# Altium PCB LazeMEGA.PcbDoc
Units mm, origin at the board's own origin, x right, y up, seen from the top; angles counter-clockwise.
Board outline 50 x 50 mm, 2 copper layers (Top Layer, Bottom Layer); 70 components, 75 nets, 320 pads, 150 vias.
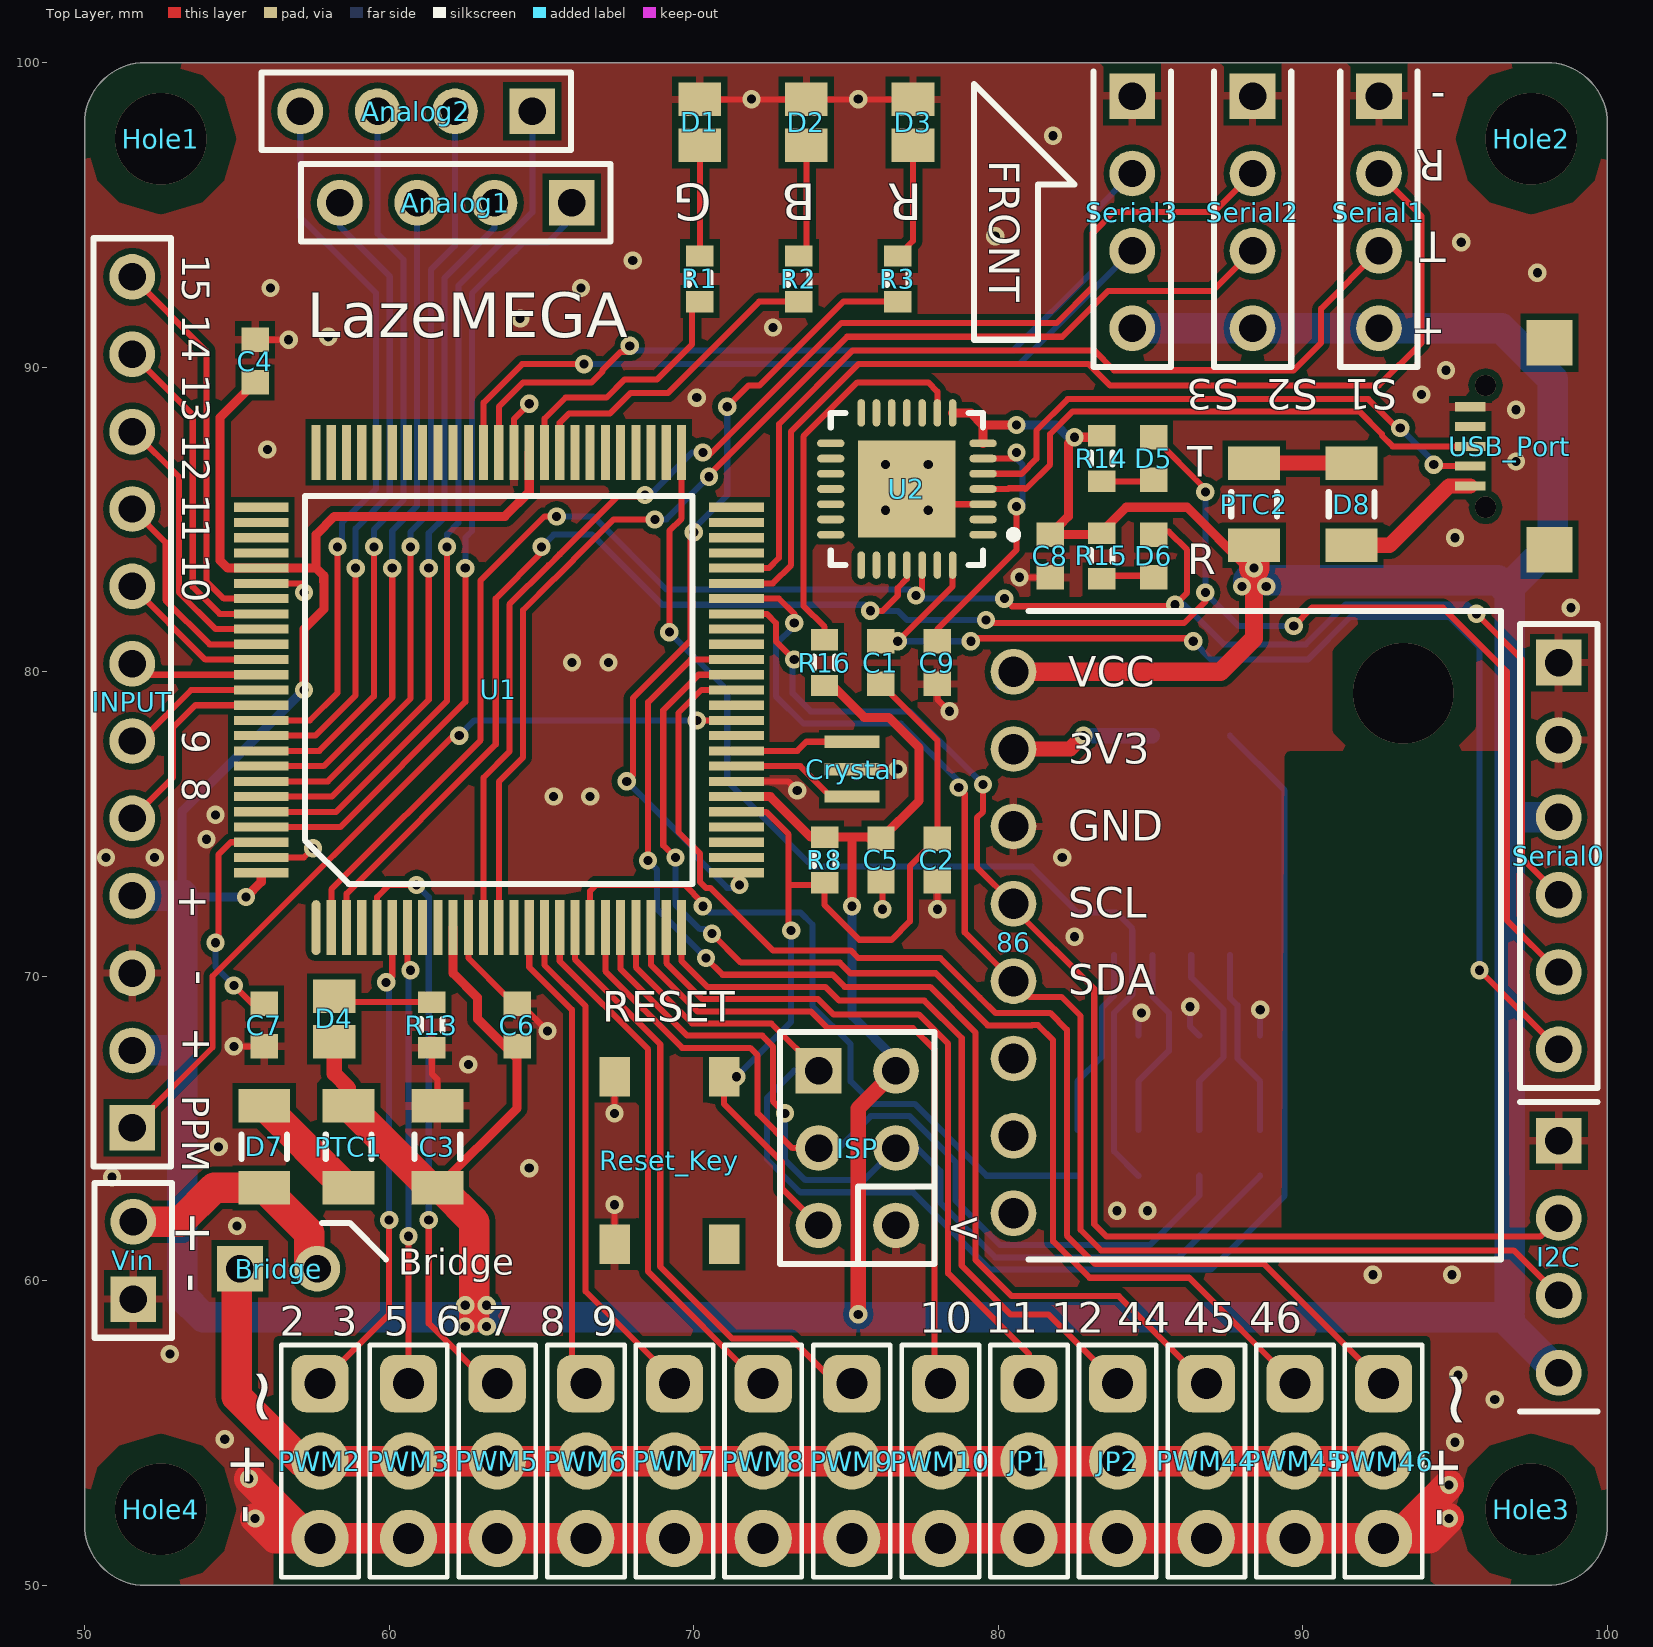
[diagram p0: Top Layer view]
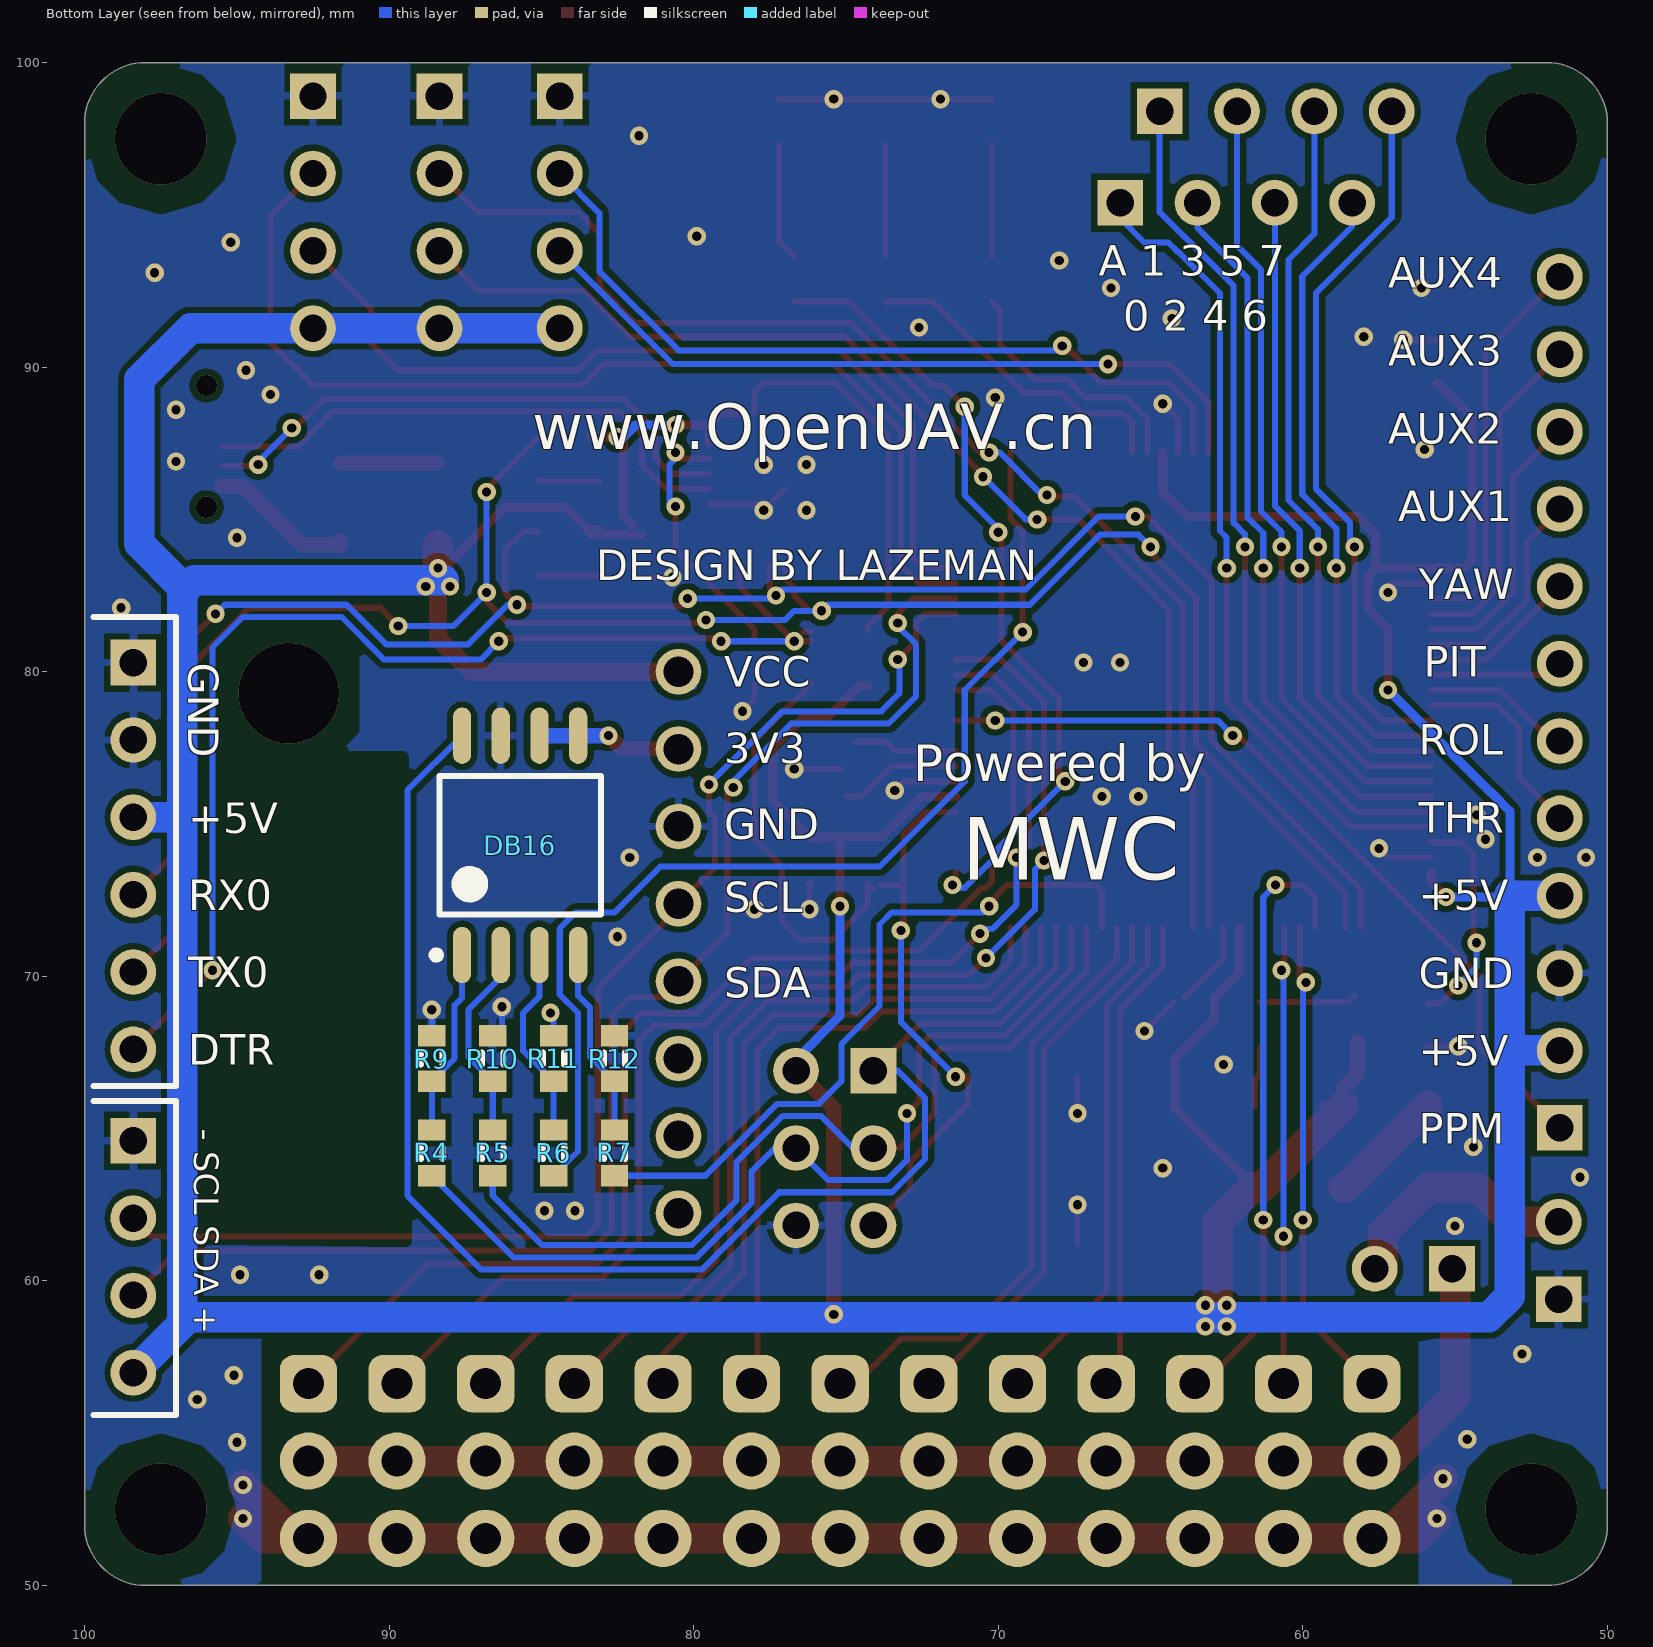
[diagram p1: Bottom Layer view, seen from below]

## Layer stack, top to bottom
Top Layer: signal copper 0.0356
Dielectric: dielectric 0.32, FR-4, Dk 4.8
Bottom Layer: signal copper 0.0356

## Board outline
50,52 50,98 cw(c52,98) 52,100 98,100 cw(c98,98) 100,98 100,52 cw(c98,52) 98,50 52,50 cw(c52,52)

## Design rules (kind name [scope] priority, off if disabled: settings)
Clearance [All] p1: gap=0.2
ComponentClearance [All] p1: gap=0.254 collisioncheckmode=3 verticalgap=0 showdistances=FALSE
HoleSize [All] p1: absolutevalues=TRUE maxlimit=3.5 minlimit=0.15 maxpercent=80.000 minpercent=20.000
HoleToHoleClearance [All] p1: gap=0 allowstackedmicrovias=TRUE
MinimumSolderMaskSliver [All] p1: minsoldermaskwidth=0
PolygonConnect PolygonConnect_2 [IsPad] p1: connectstyle=Relief reliefconductorwidth=0.254 reliefentries=4 polygonreliefangle="90 Angle"
PolygonConnect [IsVia] p2: connectstyle=Direct reliefconductorwidth=0.254 reliefentries=4 polygonreliefangle="90 Angle"
RoomDefinition LazeMEGA [InComponentClass('LazeMEGA')] p1: confinementstyle=ConfineOut formatcopy=TRUE lockcomponents=FALSE outline 0,0 50.8,0 50.8,25.4 0,25.4
RoomDefinition DB16 [InComponentClass('DB16')] p2: confinementstyle=ConfineOut formatcopy=TRUE lockcomponents=FALSE outline 101.2,49 145.3,49 145.3,61.5 101.2,61.5
RoomDefinition CP2102 [InComponentClass('CP2102')] p3: confinementstyle=ConfineOut formatcopy=TRUE lockcomponents=FALSE outline 102,74.5 193.5,74.5 193.5,86.1 102,86.1
RoutingVias [All] p1: holewidth=0.3 width=0.6 viastyle="Through Hole" minholewidth=0.3 minwidth=0.5 maxholewidth=3 maxwidth=3
SilkToSilkClearance [All] p1: silktosilkclearance=0
SilkscreenOverComponentPads [All] p1: minsilkscreentomaskgap=0
SolderMaskExpansion [All] p1: expansion=0.102
Width [All] p1: maxlimit=1 minlimit=0.2 preferedwidth=0.3
22 further rules are at their usual default settings.

## Classes and differential pairs
component class LazeMEGA: 86 Analog1 Analog2 Bridge C1 C2 C3 C4 C5 C6 C7 Crystal D1 D2 D3 D4 D7 Hole1 Hole2 Hole3 Hole4 I2C INPUT ISP JP1 JP2 PTC1 PWM2 PWM3 PWM5 PWM6 PWM7 PWM8 PWM9 PWM10 PWM44 PWM45 PWM46 R1 R2 R3 R8 R13 Reset_Key Serial0 Serial1 Serial2 Serial3 U1 Vin
component class CP2102: C8 C9 D5 D6 D8 PTC2 R14 R15 R16 U2 USB_Port
component class DB16: DB16 R4 R5 R6 R7 R9 R10 R11 R12

## Components (designator, comment, footprint, x,y, rotation, side; value= is the part's Value field where it differs from the comment)
86 "" GY-87 80.5,80 r0 top locked
Analog1 "Header 4" HDR1X4 66,95.4 r180 top
Analog2 "Header 4" HDR1X4 64.7,98.4 r180 top
Bridge "Header 2" HDR1X2 55.1,60.4 r0 top
C1 "104" CAPC1608L 76.147,80.3 r90 top
C2 "22p" CAPC1608L 78,73.818 r270 top
C3 "20uF" CAPC3216L 61.583,64.4 r270 top
C4 "104" CAPC1608L 55.6,90.2 r270 top
C5 "104" CAPC1608L 76.15,73.818 r90 top
C6 "104" CAPC1608L 64.2,68.4 r270 top
C7 "104" CAPC1608L 55.9,68.4 r90 top
C8 "104" CAPC1608L 81.7,83.8 r270 top
C9 "104" CAPC1608L 78,80.3 r90 top
Crystal "Crystal 16M" Crystal3Foot 75.2,76.8 r0 top
D1 "LED Green" CAPC2012L 70.2,98.039 r90 top
D2 "LED Blue" CAPC2012L 73.7,98.039 r90 top
D3 "LED Red" CAPC2012L 77.2,98.039 r90 top
D4 "LED Red" CAPC2012L 58.2,68.6 r90 top
D5 "LED CP" CAPC1608L 85.1,87 r90 top
D6 "LED CP" CAPC1608L 85.1,83.8 r90 top
D7 "Schottky" CAPC3216L 55.9,64.4 r90 top
D8 "Schottky" CAPC3216L 91.6,85.5 r90 top
DB16 "AT45DB16" AT45DB16 85.7,74.3 r90 bottom
Hole1 "3mmHole" 3mmHoleSmall 52.5,97.5 r0 top
Hole2 "3mmHole" 3mmHoleSmall 97.5,97.5 r90 top
Hole3 "3mmHole" 3mmHoleSmall 97.5,52.5 r90 top
Hole4 "3mmHole" 3mmHoleSmall 52.5,52.5 r90 top
I2C "Header 4" HDR1X4 98.4,64.6 r270 top
INPUT "Header 12" HDR1X12 51.562,65.024 r90 top
ISP "Header 3X2" HDR2X3 74.1,66.9 r270 top
JP1 "Servo out 1" JP 80.941,54.102 r270 top
JP2 "Servo out 1" JP 83.852,54.102 r270 top
PTC1 "Fuse" CAPC3216L 58.667,64.4 r90 top
PTC2 "Fuse" CAPC3216L 88.4,85.5 r270 top
PWM2 "Servo out 1" JP 57.658,54.102 r270 top
PWM3 "Servo out 1" JP 60.568,54.102 r270 top
PWM5 "Servo out 1" JP 63.479,54.102 r270 top
PWM6 "Servo out 1" JP 66.389,54.102 r270 top
PWM7 "Servo out 1" JP 69.3,54.102 r270 top
PWM8 "Servo out 1" JP 72.21,54.102 r270 top
PWM9 "Servo out 1" JP 75.12,54.102 r270 top
PWM10 "Servo out 1" JP 78.031,54.102 r270 top
PWM44 "Servo out 1" JP 86.762,54.102 r270 top
PWM45 "Servo out 1" JP 89.673,54.102 r270 top
PWM46 "Servo out 1" JP 92.583,54.102 r270 top
R1 "1k" RESC1608L 70.2,92.9 r90 top
R2 "1k" RESC1608L 73.45,92.9 r90 top
R3 "1k" RESC1608L 76.7,92.9 r90 top
R4 "4.7k" RESC1608L 88.6,64.2 r270 bottom
R5 "4.7k" RESC1608L 86.6,64.2 r270 bottom
R6 "4.7k" RESC1608L 84.6,64.2 r270 bottom
R7 "4.7k" RESC1608L 82.6,64.2 r270 bottom
R8 "10k" RESC1608L 74.3,73.818 r90 top
R9 "10k" RESC1608L 88.6,67.3 r270 bottom
R10 "10k" RESC1608L 86.6,67.3 r270 bottom
R11 "10k" RESC1608L 84.6,67.3 r270 bottom
R12 "10k" RESC1608L 82.6,67.3 r270 bottom
R13 "1k" RESC1608L 61.4,68.4 r270 top
R14 "1K" RESC1608L 83.4,87 r270 top
R15 "1K" RESC1608L 83.4,83.8 r270 top
R16 "10k" RESC1608L 74.295,80.3 r270 top
Reset_Key "Key" Key 67.4,66.7 r0 top locked
Serial0 "Header 6" HDR1X6 98.4,80.3 r270 top
Serial1 "Header 4" HDR1X4 92.5,98.9 r270 top
Serial2 "Header 4" HDR1X4 88.35,98.9 r270 top
Serial3 "Header 4" HDR1X4 84.4,98.9 r270 top
U1 "Atmega2560" ATMEGA2560 57.6,71.6 r90 top locked
U2 "CP2102" CP2102 77,86 r180 top
USB_Port "Micro USB" "Micro USB" 95.5,86.1 r90 top
Vin "Header 2" HDR1X2 51.6,59.4 r90 top

## Footprints (in the part's own frame and the unit in brackets; to place one, negate y for a bottom-side part, rotate by r counter-clockwise, add the part's x,y. Pads: shape width x height; smd on the part's side, far side on the other; paste and mask are expansions set on the pad)
3mmHoleSmall [mm]
  Top Layer pour cut-out: -1.27,1.905 0,2.286 1.27,1.905 1.905,1.27 2.286,0 1.905,-1.27 1.27,-1.905 0,-2.286 -1.27,-1.905 -1.905,-1.27 -2.286,0 -1.905,1.27
  Bottom Layer pour cut-out: -1.27,1.905 0,2.286 1.27,1.905 1.905,1.27 2.286,0 1.905,-1.27 1.27,-1.905 0,-2.286 -1.27,-1.905 -1.905,-1.27 -2.286,0 -1.905,1.27
AT45DB16 [mm] "SOP, 8-Leads, Body 5.3x5.4mm (max), Pitch 1.27mm, IPC Medium Density"
  oval 1.85x0.6 smd: 1(-3.6,1.905) 2(-3.6,0.635) 3(-3.6,-0.635) 4(-3.6,-1.905) 5(3.6,-1.905) 6(3.6,-0.635) 7(3.6,0.635) 8(3.6,1.905)
  silkscreen extent -3.72,-2.65 2.27,2.88, body extent -2.68,-2.7 2.68,2.7, height 2.16
ATMEGA2560 [mm]
  oval 1.8x0.3 smd: 1(0,0)
  rect 1.8x0.3 smd: 2(0,-0.5) 3(0,-1) 4(0,-1.5) 5(0,-2) 6(0,-2.5) 7(0,-3) 8(0,-3.5) 9(0,-4) 10(0,-4.5) 11(0,-5) 12(0,-5.5) 13(0,-6) 14(0,-6.5) 15(0,-7) 16(0,-7.5) 17(0,-8) 18(0,-8.5) 19(0,-9) 20(0,-9.5) 21(0,-10) 22(0,-10.5) 23(0,-11) 24(0,-11.5) 25(0,-12) 51(15.6,-12) 52(15.6,-11.5) 53(15.6,-11) 54(15.6,-10.5) 55(15.6,-10) 56(15.6,-9.5) 57(15.6,-9) 58(15.6,-8.5) 59(15.6,-8) 60(15.6,-7.5) 61(15.6,-7) 62(15.6,-6.5) 63(15.6,-6) 64(15.6,-5.5) 65(15.6,-5) 66(15.6,-4.5) 67(15.6,-4) 68(15.6,-3.5) 69(15.6,-3) 70(15.6,-2.5) 71(15.6,-2) 72(15.6,-1.5) 73(15.6,-1) 74(15.6,-0.5) 75(15.6,0)
  rect 0.3x1.8 smd: 26(1.8,-13.8) 27(2.3,-13.8) 28(2.8,-13.8) 29(3.3,-13.8) 30(3.8,-13.8) 31(4.3,-13.8) 32(4.8,-13.8) 33(5.3,-13.8) 34(5.8,-13.8) 35(6.3,-13.8) 36(6.8,-13.8) 37(7.3,-13.8) 38(7.8,-13.8) 39(8.3,-13.8) 40(8.8,-13.8) 41(9.3,-13.8) 42(9.8,-13.8) 43(10.3,-13.8) 44(10.8,-13.8) 45(11.3,-13.8) 46(11.8,-13.8) 47(12.3,-13.8) 48(12.8,-13.8) 49(13.3,-13.8) 50(13.8,-13.8) 76(13.8,1.8) 77(13.3,1.8) 78(12.8,1.8) 79(12.3,1.8) 80(11.8,1.8) 81(11.3,1.8) 82(10.8,1.8) 83(10.3,1.8) 84(9.8,1.8) 85(9.3,1.8) 86(8.8,1.8) 87(8.3,1.8) 88(7.8,1.8) 89(7.3,1.8) 90(6.8,1.8) 91(6.3,1.8) 92(5.8,1.8) 93(5.3,1.8) 94(4.8,1.8) 95(4.3,1.8) 96(3.8,1.8) 97(3.3,1.8) 98(2.8,1.8) 99(2.3,1.8) 100(1.8,1.8)
  silkscreen extent 1.43,-12.36 14.16,0.37
CAPC1608L [mm] "Chip Capacitor, Body 1.6x0.8mm, IPC High Density"
  rect 0.8x0.9 smd: 1(-0.7,0) 2(0.7,0)
  body extent -0.87,-0.48 0.87,0.48, height 1.3
CAPC2012L [mm] "Chip Capacitor, Body 2.0x1.3mm, IPC High Density"
  rect 1.1x1.4 smd: 1(-0.75,0) 2(0.75,0)
  body extent -1.1,-0.72 1.1,0.72, height 1.4
CAPC3216L [mm] "Chip Capacitor, Body 3.2x1.6mm, IPC High Density"
  rect 1.1x1.7 smd: 1(-1.35,0) 2(1.35,0)
  silkscreen extent -0.4,-0.75 0.4,0.75, body extent -1.7,-0.9 1.7,0.9, height 1.3
CP2102 [mm] "QFN, 28-Leads, Body 5.0x5.0mm (max), Pitch 0.50mm, IPC Low Density"
  oval 0.9x0.25 smd: 1(-2.5,1.5) 2(-2.5,1) 3(-2.5,0.5) 4(-2.5,0) 5(-2.5,-0.5) 6(-2.5,-1) 7(-2.5,-1.5) 15(2.5,-1.5) 16(2.5,-1) 17(2.5,-0.5) 18(2.5,0) 19(2.5,0.5) 20(2.5,1) 21(2.5,1.5)
  oval 0.25x0.9 smd: 8(-1.5,-2.5) 9(-1,-2.5) 10(-0.5,-2.5) 11(0,-2.5) 12(0.5,-2.5) 13(1,-2.5) 14(1.5,-2.5) 22(1.5,2.5) 23(1,2.5) 24(0.5,2.5) 25(0,2.5) 26(-0.5,2.5) 27(-1,2.5) 28(-1.5,2.5)
  rect 3.2x3.2 smd: 29(0,0)
  silkscreen extent -3.63,-2.5 2.5,2.5, body extent -2.5,-2.5 2.5,2.5
Crystal3Foot [mm]
  rect 1.8x0.4 smd: 1(0,0.9) 2(0,0) 3(0,-0.9)
GY-87 [mm]
  round 1.5 hole 1: 1(0,0) 2(0,-2.54) 3(0,-5.08) 4(0,-7.62) 5(0,-10.16) 6(0,-12.7) 7(0,-15.24) 8(0,-17.78)
  Top Layer pour cut-out: 14.097,1.524 14.986,0.635 14.986,-1.778 13.97,-2.794 11.557,-2.794 10.668,-1.905 10.668,0.635 11.557,1.524
  Bottom Layer pour cut-out: 11.557,1.524 14.097,1.524 14.986,0.635 14.986,-1.778 13.97,-2.794 11.557,-2.794 10.668,-1.905 10.668,0.635
  silkscreen extent 0.5,-19.3 16,2
HDR1X2 [mm] "Connector; Header; 2 Position"
  rect 1.5x1.5 hole 0.9: 1(0,0)
  round 1.5 hole 0.9: 2(2.54,0)
HDR1X4 [mm] "Connector; Header; 4 Position"
  rect 1.5x1.5 hole 0.9: 1(0,0)
  round 1.5 hole 0.9: 2(2.54,0) 3(5.08,0) 4(7.62,0)
  silkscreen extent -1.27,-1.27 8.89,1.27
HDR1X6 [mm] "Connector; Header; 6 Position"
  rect 1.5x1.5 hole 0.9: 1(0,0)
  round 1.5 hole 0.9: 2(2.54,0) 3(5.08,0) 4(7.62,0) 5(10.16,0) 6(12.7,0)
  silkscreen extent -1.27,-1.27 13.97,1.27
HDR1X12 [mm] "Connector; Header; 12 Position"
  rect 1.5x1.5 hole 0.9: 1(0,0)
  round 1.5 hole 0.9: 2(2.54,0) 3(5.08,0) 4(7.62,0) 5(10.16,0) 6(12.7,0) 7(15.24,0) 8(17.78,0) 9(20.32,0) 10(22.86,0) 11(25.4,0) 12(27.94,0)
  silkscreen extent -1.27,-1.27 29.21,1.27
HDR2X3 [mm] "Connector; Header; 3x2 Position"
  rect 1.5x1.5 hole 0.9: 1(0,0)
  round 1.5 hole 0.9: 2(0,2.54) 3(2.54,0) 4(2.54,2.54) 5(5.08,0) 6(5.08,2.54)
  silkscreen extent -1.27,-1.27 6.35,3.81
JP [mil]
  rrect50% 74x74 hole 40: 1(-99.27,2.73)
  round 74 hole 40: 2(0.73,2.73) 3(100.73,2.73)
  silkscreen extent -149,-47 151,53, body extent -147,-45 149,50, height 394
Key [mm]
  rect 1x1.3 smd: 1(0,0) 2(0,-5.5) 3(3.6,-5.5) 4(3.6,0)
"Micro USB" [mm]
  rect 0.3x1 smd: 1(0,0) 2(0.65,0) 3(1.3,0) 4(1.95,0) 5(2.6,0)
  rect 1.5x1.5 smd: 6(-2.1,-2.6) 7(4.7,-2.6)
RESC1608L [mm] "Chip Resistor, Body 1.6x0.8mm, IPC High Density"
  rect 0.7x0.9 smd: 1(-0.75,0) 2(0.75,0)
  silkscreen extent -0.2,-0.35 0.2,0.35, body extent -0.85,-0.48 0.85,0.48, height 0.9

## Part data
86: library part GY-87
Analog1 Analog2 I2C Serial1 Serial2 Serial3: "Header, 4-Pin"
Bridge Vin: "Header, 2-Pin"
C1 C2 C3 C4 C5 C6 C7 C8 C9: library part "Cap Semi", "Capacitor (Semiconductor SIM Model)"
Crystal: library part Crystal3Foot
D1 D2 D3 D4 D5 D6: library part LED2, "Typical RED, GREEN, YELLOW, AMBER GaAs LED"
D7 D8: library part "D Schottky", "Schottky Diode"
INPUT: "Header, 12-Pin"
ISP: "Header, 3-Pin, Dual row"
JP1 JP2 PWM2 PWM3 PWM5 PWM6 PWM7 PWM8 PWM9 PWM10 PWM44 PWM45 PWM46: library part "Hdr 3 Pin 0.1", "Header, 3-Pin, 0.1\""
PTC1 PTC2: library part "Fuse 1"
R1 R2 R3 R4 R5 R6 R7 R8 R9 R10 R11 R12 R13 R14 R15 R16: library part Res3, "Resistor"
Serial0: "Header, 6-Pin"

## Via types
v1: diameter 0.6, hole 0.3, Top Layer to Bottom Layer, tented both sides, 143 vias
v2: diameter 3, hole 3, Top Layer to Bottom Layer, 4 vias
v3: diameter 0.7, hole 0.7, Top Layer to Bottom Layer, 2 vias
v4: diameter 3.3, hole 3.3, Top Layer to Bottom Layer, 1 vias

## Nets (pads, with @x,y where several pads share a name; then routed paths per layer and width w, separated by ;. In a path a pad name is that pad's centre, name@x,y a point inside that pad or via, vN(x,y) a via of type N, cw(c..) or ccw(c..) an arc to the next point about the centre after c; other vN are vias at no path point)
3V3: 86.2 DB16.5 DB16.6 | length 4.7
  Top Layer w0.5: 86.2 82.36,77.46 v1(82.8,77.9)
  Bottom Layer w0.5: v1(82.8,77.9) DB16.5 DB16.6
A0: Analog1.1 U1.97 | length 26.7
  Top Layer w0.2: U1.97 58.393,74.9 62.5,79.007 v1(62.5,83.4)
  Bottom Layer w0.2: v1(62.5,83.4) 62.5,84.4 62.72,84.62 62.72,92.42 64.1,93.8 64.123,93.8 64.416,94.093 65.2,94.093 66,94.893 Analog1.1
A1: Analog2.1 U1.96 | length 28.1
  Top Layer w0.2: U1.96 58.256,75.4 61.9,79.043 v1(61.9,84.1)
  Bottom Layer w0.2: v1(61.9,84.1) 61.9,84.518 62.27,84.888 62.27,92.677 63.893,94.3 63.916,94.3 64.7,95.084 Analog2.1
A2: Analog1.2 U1.95 | length 24
  Top Layer w0.2: U1.95 58.12,75.9 61.3,79.08 v1(61.3,83.4)
  Bottom Layer w0.2: v1(61.3,83.4) 61.3,84.554 61.82,85.074 61.82,92.934 63.46,94.574 Analog1.2
A3: Analog2.2 U1.94 | length 26.1
  Top Layer w0.2: U1.94 57.984,76.4 60.7,79.116 v1(60.7,84.1)
  Bottom Layer w0.2: v1@60.6,84.2 v1(60.7,84.1) 60.7,84.591 61.37,85.261 61.37,93.191 62.16,93.981 Analog2.2
A4: Analog1.3 U1.93 | length 22
  Top Layer w0.2: U1.93 57.847,76.9 60.1,79.153 v1(60.1,83.4) v1@60,83.3
  Bottom Layer w0.2: v1(60.1,83.4) 60.1,84.627 60.92,85.447 Analog1.3
A5: Analog2.3 U1.92 | length 24.4
  Top Layer w0.2: U1.92 57.711,77.4 59.5,79.189 v1(59.5,84.1)
  Bottom Layer w0.2: v1(59.5,84.1) 59.5,84.664 60.47,85.634 60.47,93.53 59.62,94.38 Analog2.3
A6: Analog1.4 U1.91 | length 21
  Top Layer w0.2: U1.91 57.575,77.9 58.9,79.225 v1(58.9,83.4)
  Bottom Layer w0.2: Analog1.4 58.38,94.62 60.02,92.98 60.02,85.82 58.9,84.7 v1(58.9,83.4)
A7: Analog2.4 U1.90 | length 23.5
  Top Layer w0.2: U1.90 57.4,78.4 58.306,79.306 58.306,83.145 58.3,83.151 58.3,83.336 v1(58.3,84.1)
  Bottom Layer w0.2: Analog2.4 57.08,94.92 59.57,92.43 59.57,86.006 58.45,84.886 58.45,84.25 v1(58.3,84.1)
AREF: C7.2 U1.98 | length 7.5
  Top Layer w0.2: v1@54.4,71 54.4,74 54.8,74.4 U1.98 ; v1(54.9,69.7) 55.5,69.1 C7.2
  Bottom Layer w0.2: v1(54.3,71.1) 54.3,70.3 v1(54.9,69.7)
BLUE: R2.1 U1.59 | length 10.7
  Top Layer w0.2: U1.59 65.6,88.174 65.9,88.474 67.247,88.474 67.923,89.15 69.15,89.15 72.15,92.15 R2.1@73.7,92.15
DB16_CS: R7.2 U1.19 | length 23.6
  Top Layer w0.2: U1.19 66.6,72.8 66.8,73 69.7,73 70.3,72.4 v1(70.3,72.3)
  Bottom Layer w0.2: v1(70.3,72.3) 70.5,72.1 73.5,72.1 73.9,71.7 73.9,69.024 75.15,67.774 75.15,66.55 75.89,65.81 77.256,65.81 79.616,63.45 R7.2
DB16_RST: R6.2 U1.51 | length 35.8
  Top Layer w0.2: v1(69.2,81.3) 69.2,84.628 69.6,85.028 U1.51
  Bottom Layer w0.2: v1(69.2,81.3) 71.1,79.4 71.1,76.4 73.9,73.6 81.1,73.6 82.6,72.1 83.869,72.1 84.395,71.574 84.395,71.503 84.4,71.498 84.4,69.4 83.8,68.8 83.8,64.25 R6.2
DTR: C1.2 Serial0.6 U2.28 | length 38.6
  Top Layer w0.2: C1.2 v1(76.7,81) 78.5,82.8 U2.28 ; C1.2@76.147,81.3 C1.2@76.4,81.3 ; v1@79.1,81.1 86.3,81.1 v1@86.4,81.2 ; v1(95.8,70.2) Serial0.6
  Bottom Layer w0.2: v1(76.7,81) v1@79,81 ; v1(86.4,81) 87,80.4 90.166,80.4 91.566,81.8 94.8,81.8 95.8,80.8 v1(95.8,70.2)
  other v1: 79.1,81
GND: 86.3 C2.2 C3.1 C4.1 C5.1 C6.1 C7.1 C8.2 C9.1 Crystal.2 D1.2 D2.2 D3.2 DB16.7 I2C.1 INPUT.3 ISP.6 JP1.3 JP2.3 PWM2.3 PWM3.3 PWM5.3 PWM6.3 PWM7.3 PWM8.3 PWM9.3 PWM10.3 PWM44.3 PWM45.3 PWM46.3 R9.1 R10.1 R11.1 R12.1 R13.2 Reset_Key.1 Reset_Key.2 Serial0.1 Serial0.2 Serial1.1 Serial2.1 Serial3.1 U1.11 U1.32 U1.62 U1.81 U1.99 U2.3 U2.29 USB_Port.5 Vin.1 | length 81.2
  Top Layer w0.2: v1(54.9,67.7) C7.1 ; C4.1 v1(56.7,90.9) ; U1.99 57.2,73.9 v1(57.5,74.2) ; U1.81 57.1,82.9 v1@57.2,82.8 ; R13.2 61.4,66.8 61.583,66.617 C3.1 ; U1.11 62.6,70.6 C6.1@63.9,69.3 ; U1.62 64.1,88.3 v1(64.6,88.8) ; C6.1@64.25,69.15 v1(65.2,68.2) ; Reset_Key.2 v1(67.4,62.5) ; v1(67.4,65.5) Reset_Key.1 ; D1.2 D2.2 D3.2 ; U1.32 73.1,76.4 v1@73.2,76.3 ; Crystal.2 v1(76.7,76.8) 76.8,76.7 v1@76.8,76.8 ; C5.1 76.2,73.068 v1(76.2,72.2) ; U2.29 77.5,85.5 U2.3 ; v1(78,72.2) C2.2 ; C9.1 78,79.1 v1(78.4,78.7) ; v1(80.7,83.1) C8.2
  Top Layer w1: v1(55.4,53.5) PWM2.3@57.357,51.543 ; v1(55.6,52.2) 56.257,51.543 PWM2.3@57.357,51.543 ; v1(94.8,52.2) 94.143,51.543 PWM46.3@93.043,51.543 ; v1(94.8,53.3) PWM46.3@93.043,51.543 ; PWM2.3@57.357,51.543 PWM2.3 PWM3.3 PWM5.3 PWM6.3 PWM7.3 PWM8.3 PWM9.3 PWM10.3 JP1.3 JP2.3 PWM44.3 PWM45.3 PWM46.3 PWM46.3@93.043,51.543
  Bottom Layer w0.2: R11.1 84.6,68.7 v1(84.7,68.8) ; v1(86.3,69) 86.3,68.35 R10.1 ; R9.1 v1(88.6,68.9) 88.6,68.5
  other v1: 95,54.7 54.6,54.8 96.3,56.1 95.1,56.9 52.8,57.6 92.3,60.2 94.9,60.2 55,61.8 83.9,62.3 84.9,62.3 50.9,63.4 64.6,63.7 54.4,64.4 62.6,67.1 82.5,71.3 50.7,73.9 52.3,73.9 82.1,73.9 54,74.5 54.3,75.3 65.4,75.9 66.6,75.9 73.4,76.1 66,80.3 67.2,80.3 98.8,82.1 57.2,82.6 95,84.4 76.3,85.3 77.7,85.3 76.3,86.8 77.7,86.8 97,86.9 56,87.3 97,88.6 70.1,89 93.9,89.1 94.7,89.9 58,91 72.6,91.3 64.3,91.6 56.1,92.6 66.3,92.6 97.7,93.1 68,93.5 95.2,94.1 79.9,94.3 81.8,97.6 71.9,98.8 75.4,98.8
GREEN: R1.1 U1.60 | length 8.5
  Top Layer w0.2: U1.60 65.1,88.311 65.789,89 67.136,89 67.736,89.6 68.8,89.6 69.95,90.75 69.95,91.9 R1.1
MISO: DB16.8 ISP.1 U1.22 | length 48.1
  Top Layer w0.2: U1.22 68.1,70.303 69.953,68.45 72.55,68.45 ISP.1
  Bottom Layer w0.2: ISP.1 73.3,66.9 72.4,66 72.4,64 73.45,62.95 73.459,62.95 73.499,62.91 77.194,62.91 79.734,60.37 86.97,60.37 89.4,62.8 89.4,76.105 DB16.8
MOSI: ISP.4 R4.2 U1.21 | length 31
  Top Layer w0.2: U1.21 67.6,70.237 69.787,68.05 72.25,68.05 72.6,67.7 72.6,65.9 v1(73,65.5)
  Bottom Layer w0.2: v1@73,65.7 73,63.966 73.616,63.35 73.625,63.35 73.665,63.31 75.59,63.31 ISP.4 77.34,64.36 78.1,63.6 78.1,62.569 79.899,60.77 85.92,60.77 R4.2
NetC9_2: C9.2 U2.6 | length 8.8
  Top Layer w0.2: C9.2 78,81.4 80.6,84 v1(80.6,85.425) v1@80.6,85.4 ; U2.6 80.6,87 v1@80.625,87.025
  Bottom Layer w0.2: v1(80.6,85.425) 80.6,85.4 80.8,85.4 80.8,86.8 80.6,87 v1(80.6,87.2)
NetCrystal_1: Crystal.1 U1.34 | length 3.4
  Top Layer w0.2: U1.34 73.4,77.4 73.7,77.7 Crystal.1@74.7,77.7
NetCrystal_3: Crystal.3 U1.33 | length 4
  Top Layer w0.2: U1.33 73.5,76.9 74.5,75.9 Crystal.3@75,75.9
NetD1_1: D1.1 R1.2 | length 3.6
  Top Layer w0.2: R1.2 D1.1
NetD2_1: D2.1 R2.2 | length 3.6
  Top Layer w0.2: R2.2@73.7,93.65 D2.1
NetD3_1: D3.1 R3.2 | length 3.8
  Top Layer w0.2: R3.2 77.2,94.15 D3.1
NetD4_2: D4.2 R13.1 | length 3.2
  Top Layer w0.2: D4.2@58.3,69.35 58.5,69.15 R13.1
NetD5_1: D5.1 R14.2 | length 2
  Top Layer w0.2: R14.2@83.1,86.25 85.05,86.25 D5.1
NetD6_1: D6.1 R15.2 | length 2
  Top Layer w0.2: R15.2@83.1,83.15 85.05,83.15 D6.1@85.1,83.2
NetD7_2: D7.2 PTC1.1 | length 3.9
  Top Layer w1: D7.2 58.6,63.05 PTC1.1
NetD8_2: D8.2 PTC2.1 | length 3.2
  Top Layer w0.5: PTC2.1 D8.2
NetDB16_1: DB16.1 R4.1 R9.2 | length 6.2
  Bottom Layer w0.2: DB16.1 87.605,69.295 87.85,69.05 87.85,67.3 R9.2 R4.1
NetDB16_2: DB16.2 R5.1 R10.2 | length 6.5
  Bottom Layer w0.2: DB16.2 86.335,69.965 87.4,68.9 87.4,67.35 R10.2 R5.1
NetDB16_3: DB16.3 R6.1 R11.2 | length 6.4
  Bottom Layer w0.2: R6.1 R11.2 85.6,67.55 85.6,68.8 85.065,69.335 DB16.3
NetDB16_4: DB16.4 R7.1 R12.2 | length 6.2
  Bottom Layer w0.2: R7.1 R12.2 83.4,67.35 83.4,68.966 83.795,69.361 DB16.4
NetR16_1: R16.1 U2.9 | length 12.6
  Top Layer w0.2: R16.1@74.295,81.35 74.295,81.471 73.6,82.166 73.6,87.725 75.375,89.5 77.7,89.5 78,89.2 U2.9
PPM: INPUT.1 U1.36 | length 26.8
  Top Layer w0.2: INPUT.1 54.2,67.662 54.2,70 62.1,77.9 v1(62.3,77.9) ; v1(70.1,78.4) v1@70.113,78.4 ; v1@70.163,78.35 v1@70.113,78.4 ; U1.36 v1@70.113,78.4
  Bottom Layer w0.2: v1(62.3,77.9) 62.8,78.4 v1(70.1,78.4)
PWM2: PWM2.1 U1.6 | length 16
  Top Layer w0.2: PWM2.1 60,58.896 v1(60,62) ; v1(59.9,69.8) 60.1,70 U1.6
  Bottom Layer w0.2: v1(59.9,69.8) 59.9,69.788 60,69.688 v1(60,62)
PWM3: PWM3.1 U1.7 | length 15
  Top Layer w0.2: U1.7 60.6,70.3 v1(60.7,70.2) ; PWM3.1 v1(60.638,61.462)
  Bottom Layer w0.2: v1(60.638,61.462) 60.638,70.138 v1(60.7,70.2)
PWM5: PWM5.1 U1.5 | length 20.1
  Top Layer w0.2: U1.5 59.6,72.6 60,73 v1(60.9,73) ; v1(61.3,62) 61.3,58.6 63.277,56.623 PWM5.1
  Bottom Layer w0.2: v1(60.9,73) 61.3,72.6 v1(61.3,62)
PWM6: PWM6.1 U1.15 | length 15.7
  Top Layer w0.2: U1.15 64.6,70.3 66,68.9 66,57.082 PWM6.1
PWM7: PWM7.1 U1.16 | length 16.7
  Top Layer w0.2: U1.16 65.1,70.366 66.45,69.016 66.45,59.65 69.369,56.731 PWM7.1
PWM8: PWM8.1 U1.17 | length 17.8
  Top Layer w0.2: U1.17 65.6,70.5 68.5,67.6 68.5,60.3 72.177,56.623 PWM8.1
PWM9: PWM9.1 U1.18 | length 20.2
  Top Layer w0.2: U1.18 66.1,70.566 68.9,67.766 68.9,60.466 71.266,58.1 73.2,58.1 74.677,56.623 PWM9.1
PWM10: PWM10.1 U1.23 | length 22.7
  Top Layer w0.2: U1.23 68.6,70.369 70.119,68.85 73.85,68.85 74.4,68.3 77.2,68.3 77.9,67.6 77.9,56.824 PWM10.1
PWM11: JP1.1 U1.24 | length 23.8
  Top Layer w0.2: U1.24 69.1,70.434 70.284,69.25 74.086,69.25 74.586,68.75 77.386,68.75 78.35,67.786 78.35,60.25 81.011,57.589 JP1.1
PWM12: JP2.1 U1.25 | length 25.5
  Top Layer w0.2: U1.25 69.6,70.5 70.45,69.65 74.323,69.65 74.773,69.2 77.573,69.2 78.8,67.973 78.8,60.5 80.4,58.9 81.645,58.9 JP2.1
PWM44: PWM44.1 U1.40 | length 39.4
  Top Layer w0.2: v1@68.5,73.6 68.5,79 69.9,80.4 U1.40 ; v1(70.4,70.6) 70.95,70.05 74.559,70.05 74.959,69.65 77.759,69.65 79.25,68.159 79.25,60.686 80.436,59.5 83.955,59.5 PWM44.1
  Bottom Layer w0.2: v1(68.5,73.8) 68.8,73.5 68.8,72.2 70.3,70.7 v1@70.3,70.8
PWM45: PWM45.1 U1.39 | length 39.6
  Top Layer w0.2: v1@69.25,74.05 69,74.3 69,78.736 70.164,79.9 U1.39 ; v1(70.6,71.4) 71.55,70.45 74.796,70.45 75.146,70.1 77.946,70.1 79.656,68.39 81.101,68.39 81.111,68.4 81.3,68.4 81.8,67.9 81.8,61.3 83,60.1 86.265,60.1 PWM45.1
  Bottom Layer w0.2: v1(69.4,73.9) 69.4,72.351 70.201,71.55 v1@70.35,71.55
PWM46: PWM46.1 U1.38 | length 41.3
  Top Layer w0.2: U1.38 70.251,79.4 69.5,78.648 69.5,74.737 70.2,74.036 70.2,73.674 70.2,73.1 70.4,72.9 70.548,72.9 72.598,70.85 75.15,70.85 75.4,70.6 78.094,70.6 79.4,69.294 ; 79.4,69.3 79.91,68.79 80.935,68.79 80.945,68.8 81.7,68.8 82.25,68.25 82.25,61.486 83.186,60.55 88.726,60.55 PWM46.1
PWM_IN8: INPUT.5 U1.89 | length 6.7
  Top Layer w0.2: INPUT.5 52.9,76.522 52.9,78.164 53.636,78.9 U1.89
PWM_IN9: INPUT.6 U1.88 | length 4.9
  Top Layer w0.2: INPUT.6 51.824,77.724 53.5,79.4 U1.88
PWM_IN10: INPUT.7 U1.87 | length 4.4
  Top Layer w0.2: INPUT.7 51.926,79.9 U1.87
PWM_IN11: INPUT.8 U1.86 | length 5.2
  Top Layer w0.2: INPUT.8 53.966,80.4 U1.86
PWM_IN12: INPUT.9 U1.85 | length 7.2
  Top Layer w0.2: INPUT.9 52.65,84.256 52.65,82.352 54.102,80.9 U1.85
PWM_IN13: INPUT.10 U1.84 | length 9.1
  Top Layer w0.2: INPUT.10 51.616,87.884 53.1,86.4 53.1,82.6 54.3,81.4 U1.84
PWM_IN14: INPUT.11 U1.83 | length 11.1
  Top Layer w0.2: INPUT.11 53.55,88.436 53.55,82.786 54.436,81.9 U1.83
PWM_IN15: INPUT.12 U1.82 | length 13
  Top Layer w0.2: INPUT.12 54,90.526 54,82.973 54.573,82.4 U1.82
RED: R3.1 U1.26 | length 26.8
  Top Layer w0.2: v1(67.8,76.4) 68,76.6 68,79.136 69.9,81.036 69.9,84.55 v1@70,84.65 ; v1(70,84.579) v1@70,84.65 ; v1@70,84.8 v1@70,84.65 ; v1(71.1,88.7) 71.8,89.4 72.164,89.4 74.914,92.15 R3.1 ; v1@71.4,72.9 U1.26
  Bottom Layer w0.2: v1(67.8,76.4) 70,74.2 70,74 71.1,72.9 v1@71.4,72.9 ; v1@69.975,84.675 v1@70,84.7 ; v1(70,84.579) 70,84.65 v1@70,84.7 ; v1@70,84.8 v1@70,84.7 ; v1(71.1,88.7) 71.1,85.8 v1@70,84.7
  other v1: 71.5,73
RST: C1.1 C2.1 ISP.5 R8.1 Reset_Key.4 U1.30 | length 31.5
  Top Layer w0.2: v1(71.4,66.7) Reset_Key.4 71,65.8 72.9,63.9 72.9,63.02 ISP.5 ; U1.30 72.374,75.4 73.116,74.658 73.116,73 ; v1@73.116,71.5 73.116,73 ; R8.1@73.9,73 73.116,73 ; R8.1@74.116,72.884 R8.1 74.3,72.336 75.436,71.2 76.5,71.2 77.1,71.8 77.1,73.618 C2.1 78,77.747 C1.1
  Bottom Layer w0.2: v1(71.4,66.7) 73.2,68.5 v1(73.2,71.5)
RX0: D6.2 Serial0.4 U1.2 U2.26 | length 64
  Top Layer w0.2: U1.2 58.1,72.851 63,77.751 63,83 65.1,85.1 v1(65.5,85.1) ; v1(77.3,82.5) 77.5,82.7 U2.26 ; v1(80.2,82.4) 80.45,82.15 85.75,82.15 86.2,82.6 86.2,84 85.6,84.6 D6.2@85.1,84.6 ; v1@95.85,81.75 97.2,80.4 97.2,73.88 Serial0.4
  Bottom Layer w0.2: v1(65.5,85.1) 66.7,85.1 69.1,82.7 77.1,82.7 v1(77.3,82.5) 77.4,82.4 v1(80.2,82.4) ; v1(85.8,82.2) 86.1,82.2 87.4,80.9 90.1,80.9 91.4,82.2 95.4,82.2 v1(95.7,81.9)
RX1: Serial1.2 U1.45 | length 35.1
  Top Layer w0.2: U1.45 72.6,82.9 73.2,83.5 73.2,87.891 75.409,90.1 82.964,90.1 83.664,89.4 92.5,89.4 93.9,90.8 93.9,94.96 Serial1.2
RX2: Serial2.2 U1.12 | length 42.6
  Top Layer w0.2: U1.12 63.1,76.527 63.95,77.377 63.95,82.214 65.236,83.5 65.248,83.5 65.6,83.851 65.6,83.863 67.486,85.75 68.5,85.75 68.45,85.8 v1(68.4,85.8) ; v1@70.5,87.1 74.85,91.45 81.914,91.45 83.1,92.636 83.1,94.4 83.8,95.1 87.09,95.1 Serial2.2 Serial2.2@88.35,96.15
  Bottom Layer w0.2: v1(68.4,85.8) 68.45,85.8 68.5,85.75 69.95,87.2 v1(70.3,87.2)
RX3: Serial3.2 U1.63 | length 26.7
  Top Layer w0.2: U1.63 63.6,88.7 64.4,89.5 66.649,89.5 67,89.851 67,89.9 67.6,90.5 v1@67.9,90.5
  Bottom Layer w0.2: v1(67.9,90.7) 68.05,90.55 80.494,90.55 83.1,93.156 83.1,95.06 Serial3.2
SCK: ISP.3 R5.2 U1.20 | length 28.7
  Top Layer w0.2: U1.20 67.1,70.172 69.622,67.65 71.85,67.65 72.1,67.4 72.1,65.5 73.24,64.36 ISP.3
  Bottom Layer w0.2: ISP.3 74.76,64.36 75.81,65.41 77.09,65.41 78.6,63.9 78.6,62.635 80.065,61.17 84.97,61.17 86.6,62.8 R5.2
SCL: 86.4 I2C.2 U1.43 | length 43.4
  Top Layer w0.2: U1.43 72.4,81.9 72.7,81.6 72.7,81 v1(73.3,80.4) ; v1@79.5,76.4 79.5,75.405 79.3,75.205 79.3,73.58 86.4 80.5,72.236 83.15,69.586 83.15,61.859 83.559,61.45 97.79,61.45 I2C.2
  Bottom Layer w0.2: v1@73.25,80.4 73.25,79.286 73.836,78.7 77.1,78.7 v1(79.5,76.3)
SDA: 86.5 I2C.3 U1.44 | length 45.6
  Top Layer w0.2: U1.44 72.8,82.4 73.3,81.9 v1(73.3,81.6) ; v1(78.7,76.2) 78.9,76 78.9,71.44 86.5 81.02,69.32 82.08,69.32 82.7,68.7 82.7,61.673 83.373,61 96.92,61 I2C.3
  Bottom Layer w0.2: v1(73.3,81.6) 73.3,81.5 72.7,80.9 72.7,79.2 73.6,78.3 76.8,78.3 v1@78.7,76.4
TX0: D5.2 Serial0.5 U1.3 U2.25 | length 69
  Top Layer w0.2: U1.3 58.6,72.715 63.5,77.615 63.5,82.4 65,83.9 v1(65,84.1) ; v1(75.8,82) 76.2,82 76.7,82.5 76.7,82.749 77,83.049 U2.25 ; v1(79.6,81.7) 79.7,81.6 86.1,81.6 86.8,82.3 v1(86.8,82.6) ; D5.2 86.8,86 v1(86.8,85.9) ; v1(89.7,81.5) 90.3,82.1 94.6,82.1 96.7,80 96.7,71.84 Serial0.5
  Bottom Layer w0.2: v1(65,84.1) 65.4,84.5 66.664,84.5 68.964,82.2 75.6,82.2 v1(75.8,82) 76.7,82 77,81.7 v1(79.6,81.7) ; v1(86.8,85.9) v1(86.8,82.6) 87.9,81.5 v1(89.7,81.5)
TX1: Serial1.3 U1.46 | length 29.5
  Top Layer w0.2: U1.46 72.464,83.4 72.8,83.736 72.8,88.127 75.223,90.55 83.15,90.55 83.8,89.9 89.7,89.9 90.6,90.8 90.6,91.92 Serial1.3
  Bottom Layer w0.2: Serial1.3@92.22,93.82 Serial1.3
TX2: Serial2.3 U1.13 | length 39.2
  Top Layer w0.2: U1.13 63.6,76.391 64.4,77.191 64.4,82.027 65.423,83.05 65.435,83.05 66.05,83.665 66.05,83.677 67.373,85 v1@68.5,85 ; v1@70.632,86.6 70.636,86.6 75.036,91 82.1,91 83.6,92.5 87.03,92.5 Serial2.3
  Bottom Layer w0.2: v1(68.723,85) 69.1,85 v1(70.5,86.4)
TX3: Serial3.3 U1.64 | length 25
  Top Layer w0.2: U1.64 63.1,88.836 64.364,90.1 v1(66.4,90.1)
  Bottom Layer w0.2: v1(66.4,90.1) 80.68,90.1 Serial3.3
USB_D+: U2.4 USB_Port.3 | length 18.2
  Top Layer w0.2: U2.4 80.326,86 80.351,86.025 80.849,86.025 80.874,86 80.9,86 81.7,86.8 81.7,87.805 82.445,88.55 91.85,88.55 92.6,87.8 92.6,87.751 92.951,87.4 93,87.4 USB_Port.3
USB_D-: U2.5 USB_Port.2 | length 18.4
  Top Layer w0.2: U2.5 80.764,86.5 81.25,86.986 81.25,87.921 82.279,88.95 92.15,88.95 v1@93.1,88 ; v1(94.3,86.8) 94.35,86.75 USB_Port.2
  Bottom Layer w0.2: v1(93.2,88) 94.3,86.9 v1(94.3,86.8)
V_USB: D8.1 USB_Port.1 | length 4.9
  Top Layer w0.5: D8.1@91.6,84.3 D8.1 92.85,84.15 94.8,86.1 USB_Port.1
VCC: 86.1 C3.2 C4.2 C5.2 C6.2 C8.1 D4.1 I2C.4 INPUT.2 INPUT.4 ISP.2 PTC1.2 PTC2.2 R8.2 R14.1 R15.1 R16.2 Serial0.3 Serial1.4 Serial2.4 Serial3.4 U1.10 U1.31 U1.61 U1.80 U1.100 U2.7 U2.8 | length 236.6
  Top Layer w0.3: v1(55.3,72.6) 55.8,73.1 U1.100 ; C4.2 54.45,88.35 54.45,83.65 54.7,83.4 U1.80 57.6,83.4 ; v1(57.2,79.4) 57.2,81.4 57.856,82.056 57.856,82.959 57.85,82.965 57.85,83.15 57.6,83.4 ; PTC1.2 PTC1.2@59.3,65.75 ; C3.2 64.2,65.667 64.2,67.3 62.9,68.6 62.9,69.3 62.1,70.1 U1.10 ; U1.61 64.6,85.9 63.8,85.1 58.2,85.1 57.6,84.5 57.6,83.4 ; U1.31 72.511,75.9 73.843,74.568 R8.2 75.2,74.568 ; R16.2 74.55,79.55 75.6,78.5 76.4,78.5 77.4,77.5 77.4,75.768 C5.2 ; v1(75.2,72.3) 75.2,74.568 ; U2.8 79.1,88.5 79.5,88.1 ; U2.7 79.5,88.1 ; v1(80.6,88.1) 79.5,88.1 ; C8.1 83.35,84.5 R15.1 ; C8.1@82,84.8 82.3,85.1 82.3,87.5 v1(82.5,87.7) 83.35,87.7 R14.1 ; R15.1@83.1,84.65 83.45,84.65 84.2,85.4 86.2,85.4 88.2,83.4 v1(88.4,83.4) ; 75.2,74.568 C5.2@75.732,74.568 ; C5.2@75.732,74.568 76.1,74.568 C5.2 ; C5.2@75.732,74.568 75.782,74.518 C5.2
  Top Layer w0.5: D4.1 58.2,66.8 58.667,66.333 PTC1.2 ; v1@75.425,58.875 v1(75.4,58.9) 75.4,65.66 ISP.2
  Top Layer w0.6: 86.1 87.3,80 88.4,81.1 v1(88.4,83.4)
  Top Layer w1: PTC1.2 61.367,63.05 C3.2 ; C3.2@61.659,63.072 62.8,61.931 62.8,58.8 ; v1(88.4,83.4) PTC2.2
  Bottom Layer w0.3: v1(55.3,72.6) 53.244,72.6 53.2,72.644 53.2,72.7 53.2,75.419 53.831,76.05 53.85,76.05 v1(57.2,79.4) ; v1(75.2,72.3) 75.2,68.7 76.64,67.26 ISP.2 ; 86.1@80.05,79.55 86.1 ; v1(80.6,88.1) 81.9,88.1 82.3,87.7 v1(82.5,87.7) ; v1@88.2,82.8 v1(88.8,82.8)
  Bottom Layer w0.6: 78.575,58.8 78.6,58.825
  Bottom Layer w1: INPUT.2 53.182,67.564 53.2,67.582 ; INPUT.4 53.144,72.644 ; 53.2,72.7 53.144,72.644 ; Serial3.4 96.52,91.28 98.2,89.6 98.2,84.2 96.8,82.8 ; v1@88.2,83 96.4,83 96.8,82.6 96.8,75.219 ; 96.8,58.8 96.58,58.8 ; I2C.4 96.58,58.8 ; Serial0.3 96.801,75.22 96.8,75.219 ; 53.144,72.644 53.2,72.644 53.2,67.582 ; 53.2,67.582 53.2,59.5 53.9,58.8 78.575,58.8 96.58,58.8 ; 96.58,58.8 96.8,59.02 96.8,75.219
  other v1: 62.5,58.5 63.2,58.5 62.5,59.2 63.2,59.2 88,82.8
VCC_ESC: Bridge.1 JP1.2 JP2.2 PWM2.2 PWM3.2 PWM5.2 PWM6.2 PWM7.2 PWM8.2 PWM9.2 PWM10.2 PWM44.2 PWM45.2 PWM46.2 | length 42.7
  Top Layer w1: Bridge.1@55,60.4 55,56.2 57.117,54.083 PWM2.2 PWM3.2 PWM5.2 PWM6.2 PWM7.2 PWM8.2 PWM9.2 PWM10.2 JP1.2 JP2.2 PWM44.2 PWM45.2 PWM46.2
VCC_IN: Bridge.2 D7.1 Vin.2 | length 8
  Top Layer w1: Vin.2 53.14,61.94 54.25,63.05 D7.1 57.38,61.57 57.38,60.66 Bridge.2@57.64,60.66
pads on no net: 86.6 86.7 86.8 Reset_Key.3 U1.1 U1.4 U1.8 U1.9 U1.14 U1.27 U1.28 U1.29 U1.35 U1.37 U1.41 U1.42 U1.47 U1.48 U1.49 U1.50 U1.52 U1.53 U1.54 U1.55 U1.56 U1.57 U1.58 U1.65 U1.66 U1.67 U1.68 U1.69 U1.70 U1.71 U1.72 U1.73 U1.74 U1.75 U1.76 U1.77 U1.78 U1.79 U2.1 U2.2 U2.10 U2.11 U2.12 U2.13 U2.14 U2.15 U2.16 U2.17 U2.18 U2.19 U2.20 U2.21 U2.22 U2.23 U2.24 U2.27 USB_Port.4 USB_Port.6 USB_Port.7
copper on no net:
  other v2: 52.5,52.5 97.5,52.5 52.5,97.5 97.5,97.5
  other v3: 96,85.4 96,89.4
  other v4: 93.3,79.3

## Polygon pours and split planes (outlines as drawn)
GND on Top Layer "Top Layer-No Net" (solid, pour order 1000): 50,52 50,98 cw(c52,98) 52,100 98,100 cw(c98,98) 100,98 100,52 cw(c98,52) 98,50 52,50 cw(c52,52)
GND on Bottom Layer "Top Layer-No Net1" (solid, pour order 1001): 50,52 50,98 cw(c52,98) 52,100 98,100 cw(c98,98) 100,98 100,52 cw(c98,52) 98,50 52,50 cw(c52,52)

## Other copper
Top Layer:
  pour cut-out: 56.4,58 94,58 94,50 56.4,50
  pour cut-out: 96.5,77.2 96.593,61.394 89.5,61.35 89.6,77.2
Bottom Layer:
  pour cut-out: 56.4,58 94,58 94,50 56.4,50
  pour cut-out: 89.55,77.2 96.55,77.2 96.55,61.4 89.45,61.3

## Silkscreen, mask and mechanical layers (free items; w line width, h text height)
Top Overlay:
  lines w0.2: 57.8,61.9 58.7,61.9 59.9,60.7 ; 75.4,60.6 75.4,63.1 77.8,63.1 ; 79.2,90.9 81.3,90.9 81.3,96 82.5,96 79.2,99.3 79.2,90.9
  text "-" at 94.7,99.3 h1 r180
  text "R" at 94.7,97.122 h1 r180
  text "FRONT" at 79.7,96.8 h1 r270
  text "G" at 70.6,96.025 h1.2 r180
  text "B" at 74,96.025 h1.2 r180
  text "R" at 77.506,96.025 h1.2 r180
  text "T" at 94.7,94.444 h1 r180
  text "15 14 13 12 11 10" at 53.2,93.7 h0.91 r270
  text "+" at 94.7,91.6 h1 r180
  text "LazeMEGA" at 57.3,90.5 h2.5
  text "S1  S2  S3" at 93.1,89.6 h1 r180
  text "T" at 86.2,86.4 h1
  text "R" at 86.2,83.2 h1
  text "VCC" at 82.3,79.5 h1
  text "9  8" at 53.2,78.1 h0.91 r270
  text "3V3" at 82.3,76.975 h1
  text "GND" at 82.3,74.45 h1
  text "+" at 53.1,73 h1 r270
  text "SCL" at 82.3,71.925 h1
  text "-" at 54.1,69.7 h1 r90
  text "SDA" at 82.3,69.4 h1
  text "RESET" at 67,68.5 h1
  text "+" at 54.1,67.2 h1 r90
  text "PPM" at 53.2,66.1 h0.89 r270
  text "+ -" at 53,62.3 h1.3 r270
  text "<" at 78.3,61.3 h1
  text "Bridge" at 60.3,60.2 h0.85
  text "10 11 12 44 45 46" at 77.4,58.3 h1
  text "2  3  5  6  7  8  9" at 56.4,58.2 h0.97
  text "~" at 54.5,57.2 h3 r270
  text "~" at 93.7,57.1 h3 r270
  text "+ -" at 54.8,54.7 h1.3 r270
  text "+ -" at 94,54.6 h1.3 r270
Bottom Overlay:
  lines w0.2: 99.7,55.6 97,55.6 97,55.9 97,65.9 99.7,65.9 ; 99.7,66.4 97,66.4 97,81.8 99.7,81.8
  text "A 1 3 5 7" at 66.7,93 h1
  text "AUX4" at 57.2,92.6 h1
  text "0 2 4 6" at 65.9,91.2 h1
  text "AUX3" at 57.2,90.045 h1
  text "AUX2" at 57.2,87.491 h1
  text "www.OpenUAV.cn" at 85.3,87.3 h1.5
  text "AUX1" at 56.867,84.936 h1
  text "DESIGN BY LAZEMAN" at 83.2,83 h1
  text "YAW" at 56.2,82.382 h1
  text "GND" at 96.6,80.3 h1 r90
  text "PIT" at 56.034,79.827 h1
  text "VCC" at 79,79.5 h1
  text "ROL" at 56.2,77.273 h1
  text "3V3" at 79,77 h1
  text "Powered by" at 72.8,76.4 h1.2
  text "THR" at 56.2,74.718 h1
  text "+5V" at 96.6,74.7 h1
  text "GND" at 79,74.5 h1
  text "MWC" at 71.2,72.5 h3.5
  text "+5V" at 56.2,72.164 h1
  text "RX0" at 96.6,72.167 h1
  text "SCL" at 79,72.1 h1
  text "GND" at 56.2,69.609 h1
  text "TX0" at 96.6,69.633 h1
  text "SDA" at 79,69.3 h1
  text "DTR" at 96.6,67.1 h1
  text "+5V" at 56.2,67.055 h1
  text "- SCL SDA +" at 96.4,65 h0.8 r90
  text "PPM" at 56.2,64.5 h1
Mechanical 1:
  the board outline again, w0.2